# EAGLE board cable-adapter (EAGLE 6.5.0)
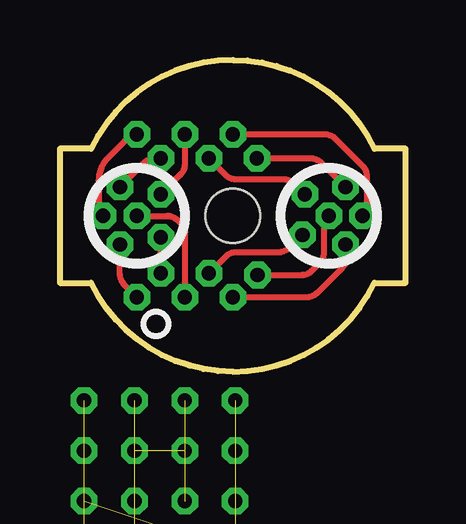
[diagram p0: board, top side]

Size 14.4 x 13 mm. Coordinates in mm from the lower left corner, seen from the top.
Outline: 7.2,0 arc-65 1.3,3.7 0,3.7 0,9.3 1.3,9.3 arc-65 7.2,13 arc-65 13.1,9.3 14.4,9.3 14.4,3.7 13.1,3.7 arc-65 7.2,0
Copper layers (1*16): Top 0.035mm / dielectric 1.5mm / Bottom 0.035mm
Design rules "seeed-studio-2-layer": minimum track width 6mil, minimum drill 12mil, track to track 6mil, track to pad 6mil, pad to pad 6mil, via to via 6mil, smd to smd 0mil, copper to edge 10mil, drill to drill 10mil, minimum pad ring 10mil, minimum via ring 6mil, stop-mask expansion 2mil, vias tented up to drill 100mil, thermal gap 10mil
Holes 2.26 mm at 7.2,6.5

## Footprints (pad centres in the part's own frame; a part is rotated, then mirrored left to right if it is on the bottom)
SPI_WIRE+ = drill 0.6 octagon: P$1 0,0

## Placement (x,y rotation side)
COM_CLK+  [SPI_WIRE+]  2.5,7.7 0 top
COM_CLK-  [SPI_WIRE+]  4.2,5.6 0 top
COM_CS+  [SPI_WIRE+]  1.8,6.5 0 top
COM_CS-  [SPI_WIRE+]  2.5,5.3 0 top
COM_GND  [SPI_WIRE+]  11.2,6.5 0 top
COM_MIS01-  [SPI_WIRE+]  10.1,5.7 0 top
COM_MIS02-  [SPI_WIRE+]  11.9,5.3 0 top
COM_MIS03-  [SPI_WIRE+]  3.1,-1.2 0 top
COM_MIS04-  [SPI_WIRE+]  5.2,-1.2 0 top
COM_MISO1+  [SPI_WIRE+]  10.2,7.4 0 top
COM_MISO2+  [SPI_WIRE+]  12.6,6.5 0 top
COM_MISO3+  MISO3+  [SPI_WIRE+]  7.3,-1.2 0 top
COM_MISO4+  [SPI_WIRE+]  1,-3.3 0 top  (outside the outline)
COM_MOSI+  [SPI_WIRE+]  4.2,7.4 0 top
COM_MOSI-  [SPI_WIRE+]  3.2,6.5 0 top
COM_RLED1  [SPI_WIRE+]  7.3,-3.3 0 top  (outside the outline)
COM_RLED2  [SPI_WIRE+]  1,-1.2 0 top
COM_VCC  [SPI_WIRE+]  11.9,7.7 0 top
COM_VLED1  [SPI_WIRE+]  3.1,-3.3 0 top  (outside the outline)
COM_VLED2  [SPI_WIRE+]  5.2,-3.3 0 top  (outside the outline)
T1M_CLK+  [SPI_WIRE+]  4.2,8.9 0 top
T1M_CLK-  [SPI_WIRE+]  4.2,4.1 0 top
T1M_CS+  [SPI_WIRE+]  3.2,9.9 0 top
T1M_CS-  [SPI_WIRE+]  3.2,3.1 0 top
T1M_GND  [SPI_WIRE+]  8.23,4.03 0 top
T1M_MIS01-  [SPI_WIRE+]  6.2,4.1 0 top
T1M_MIS02-\  [SPI_WIRE+]  7.2,3.1 0 top
T1M_MIS03-  [SPI_WIRE+]  3.1,-5.4 0 top  (outside the outline)
T1M_MIS04-  [SPI_WIRE+]  5.2,-5.4 0 top  (outside the outline)
T1M_MISO1+  [SPI_WIRE+]  6.2,8.9 0 top
T1M_MISO2+  [SPI_WIRE+]  7.2,9.9 0 top
T1M_MISO3+  [SPI_WIRE+]  7.3,-5.4 0 top  (outside the outline)
T1M_MISO4+  [SPI_WIRE+]  1,-7.5 0 top  (outside the outline)
T1M_MOSI+  [SPI_WIRE+]  5.2,9.9 0 top
T1M_MOSI-  [SPI_WIRE+]  5.2,3.1 0 top
T1M_RLED1  [SPI_WIRE+]  7.3,-7.5 0 top  (outside the outline)
T1M_RLED2  [SPI_WIRE+]  1,-5.4 0 top  (outside the outline)
T1M_VCC  [SPI_WIRE+]  8.2,8.9 0 top
T1M_VLED1  [SPI_WIRE+]  3.1,-7.5 0 top  (outside the outline)
T1M_VLED2  [SPI_WIRE+]  5.2,-7.5 0 top  (outside the outline)

## Library data of the parts
COM_CLK+ COM_CLK- COM_CS+ COM_CS- COM_GND COM_MIS01- COM_MIS02- COM_MIS03- COM_MIS04- COM_MISO1+ COM_MISO2+ COM_MISO3+ COM_MISO4+ COM_MOSI+ COM_MOSI- COM_RLED1 COM_RLED2 COM_VCC COM_VLED1 COM_VLED2 T1M_CLK+ T1M_CLK- T1M_CS+ T1M_CS- T1M_GND T1M_MIS01- T1M_MIS02-\ T1M_MIS03- T1M_MIS04- T1M_MISO1+ T1M_MISO2+ T1M_MISO3+ T1M_MISO4+ T1M_MOSI+ T1M_MOSI- T1M_RLED1 T1M_RLED2 T1M_VCC T1M_VLED1 T1M_VLED2 = jonnew

## Nets
+LED: COM_VLED1.P$1 COM_VLED2.P$1 T1M_VLED1.P$1 T1M_VLED2.P$1
-LED: COM_RLED1.P$1 COM_RLED2.P$1 T1M_RLED1.P$1 T1M_RLED2.P$1
CLK+: COM_CLK+.P$1 T1M_CLK+.P$1
CLK-: COM_CLK-.P$1 T1M_CLK-.P$1
CS+: COM_CS+.P$1 T1M_CS+.P$1
CS-: COM_CS-.P$1 T1M_CS-.P$1
GND: COM_GND.P$1 T1M_GND.P$1
MIS02-: COM_MIS02-.P$1 T1M_MIS02-\.P$1
MIS02-1: COM_MIS04-.P$1 T1M_MIS04-.P$1
MISO1+: COM_MISO1+.P$1 T1M_MISO1+.P$1
MISO1+1: COM_MISO3+.P$1 T1M_MISO3+.P$1
MISO1-: COM_MIS01-.P$1 T1M_MIS01-.P$1
MISO1-1: COM_MIS03-.P$1 T1M_MIS03-.P$1
MISO2+: COM_MISO2+.P$1 T1M_MISO2+.P$1
MISO2+1: COM_MISO4+.P$1 T1M_MISO4+.P$1
MOSI+: COM_MOSI+.P$1 T1M_MOSI+.P$1
MOSI-: COM_MOSI-.P$1 T1M_MOSI-.P$1
VCC: COM_VCC.P$1 T1M_VCC.P$1

## Tracks (layer width: path | path; a pad name or v marks a point on that pad's centre or on a via)
+LED  (3 unrouted)
-LED  (3 unrouted)
CLK+
  Top 0.254: COM_CLK+.P$1 3.51,8.71 arc-45 3.96,8.9 T1M_CLK+.P$1
CLK-
  Top 0.254: T1M_CLK-.P$1 COM_CLK-.P$1
CS+
  Top 0.254: T1M_CS+.P$1 2.98,9.9 2,8.92 arc45 1.61,7.98 1.61,6.69 COM_CS+.P$1 1.74,6.56
CS-
  Top 0.254: T1M_CS-.P$1 2.69,3.61 arc-45 2.5,4.06 COM_CS-.P$1
GND
  Top 0.254: T1M_GND.P$1 10.05,4.03 arc45 10.5,4.22 10.82,4.54 arc45 11.01,4.99 11.01,6.31 COM_GND.P$1
MIS02-
  Top 0.254: COM_MIS02-.P$1 11.9,4.73 arc-45 11.71,4.28 10.72,3.29 arc-45 10.27,3.1 T1M_MIS02-\.P$1
MIS02-1  (1 unrouted)
MISO1+
  Top 0.254: T1M_MISO1+.P$1 6.89,8.21 arc45 7.34,8.02 9.31,8.02 arc-45 9.76,7.84 COM_MISO1+.P$1
MISO1+1  (1 unrouted)
MISO1-
  Top 0.254: COM_MIS01-.P$1 10.08,5.7 9.54,5.16 arc-45 9.1,4.98 7.34,4.98 arc45 6.89,4.79 T1M_MIS01-.P$1
MISO1-1  (1 unrouted)
MISO2+
  Top 0.254: T1M_MISO2+.P$1 11.03,9.9 arc-45 11.48,9.71 12.6,8.59 arc-45 12.79,8.14 12.79,6.95 arc-45 COM_MISO2+.P$1
MISO2+1  (1 unrouted)
MOSI+
  Top 0.254: T1M_MOSI+.P$1 5.2,8.66 arc-45 5.01,8.21 COM_MOSI+.P$1
MOSI-
  Top 0.254: COM_MOSI-.P$1 4.45,6.5 arc-45 4.9,6.31 5.01,6.2 arc-45 5.2,5.75 T1M_MOSI-.P$1
VCC
  Top 0.254: T1M_VCC.P$1 10.44,8.9 arc-45 10.89,8.71 COM_VCC.P$1